# Altium PCB CH340G.PcbDoc
Units mm, origin at the board's own origin, x right, y up, seen from the top; angles counter-clockwise.
Board outline 31.42 x 13.85 mm, 4 copper layers (Top Layer, VCC, GND, Bottom Layer), stack 0.778 mm thick; 19 components, 13 nets, 66 pads, 96 vias.
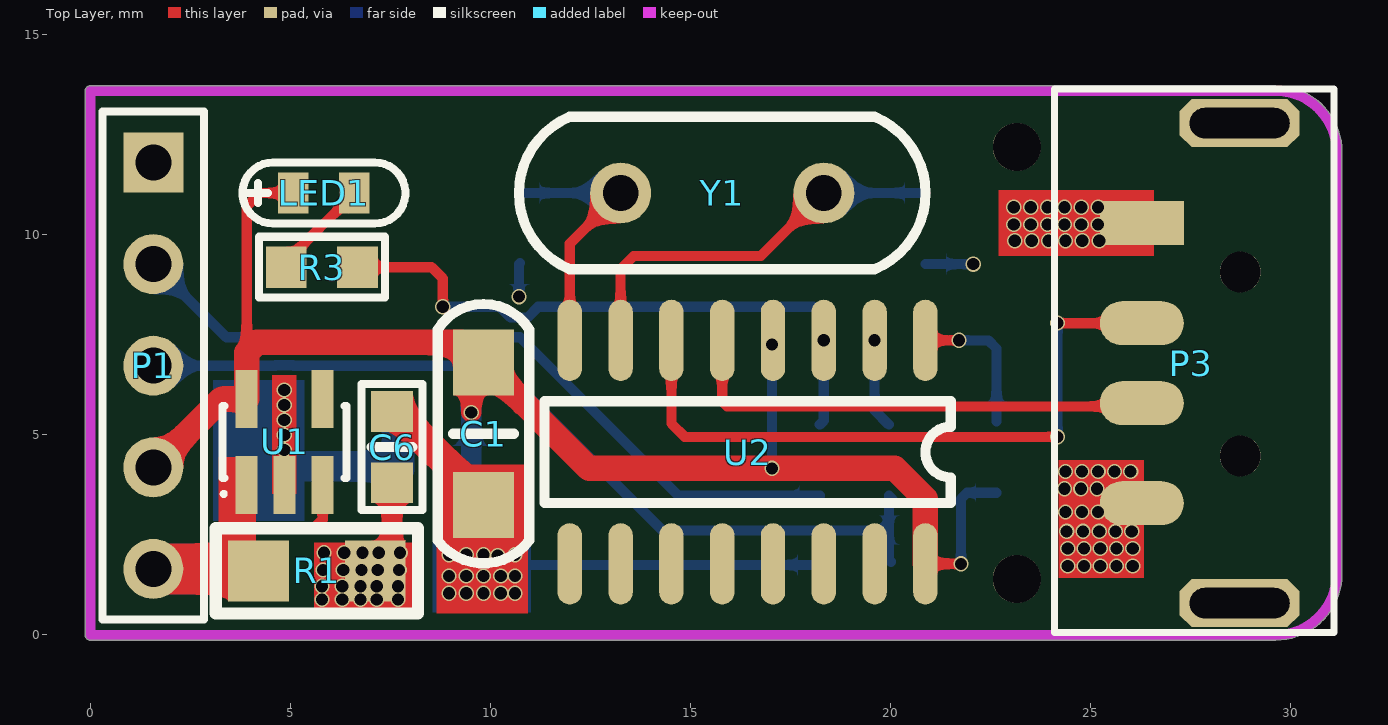
[diagram p0: Top Layer view]
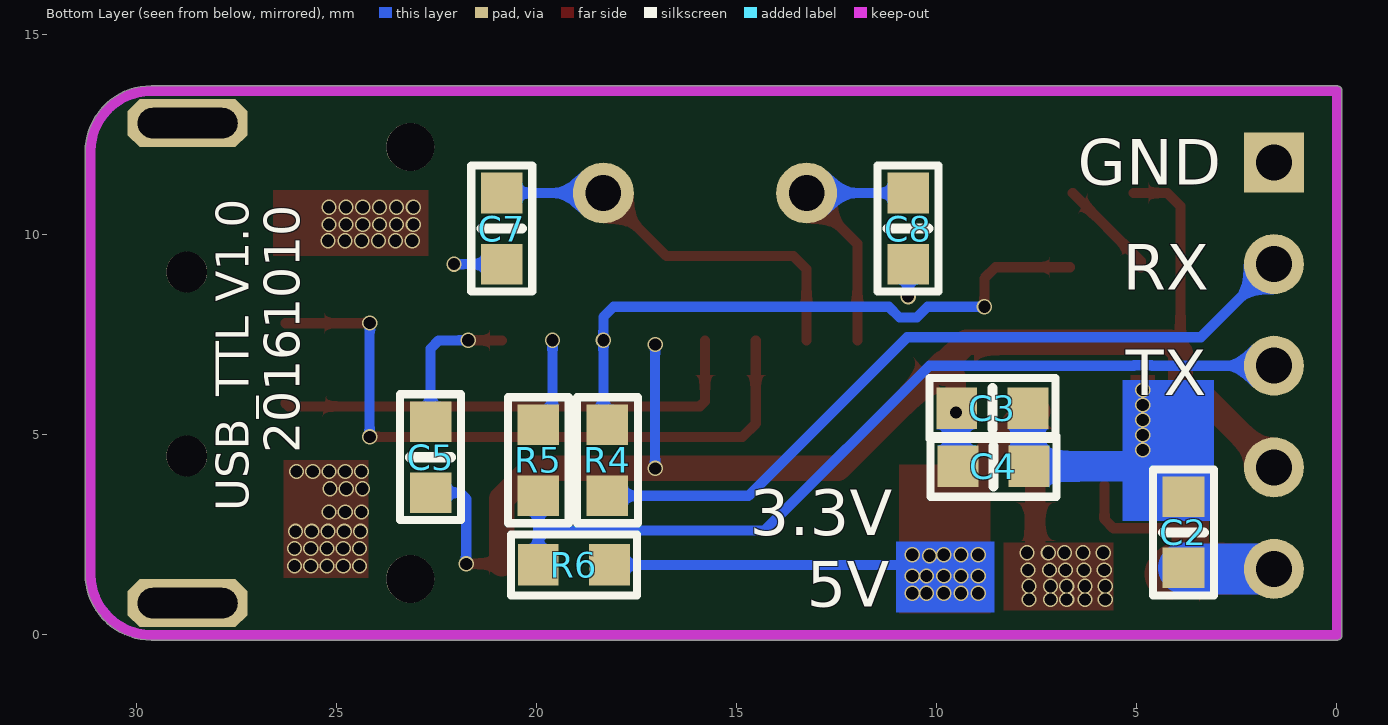
[diagram p1: Bottom Layer view, seen from below]
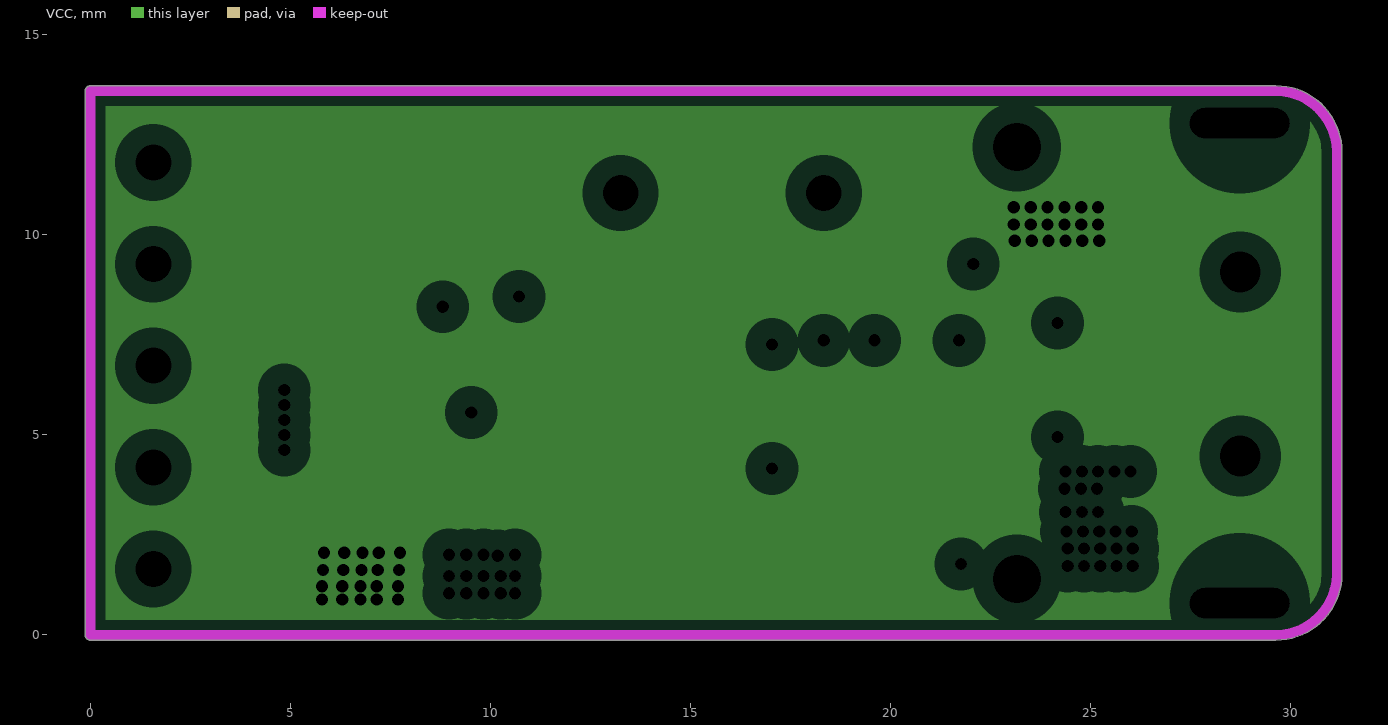
[diagram p2: VCC, clearances drawn from the general rule]
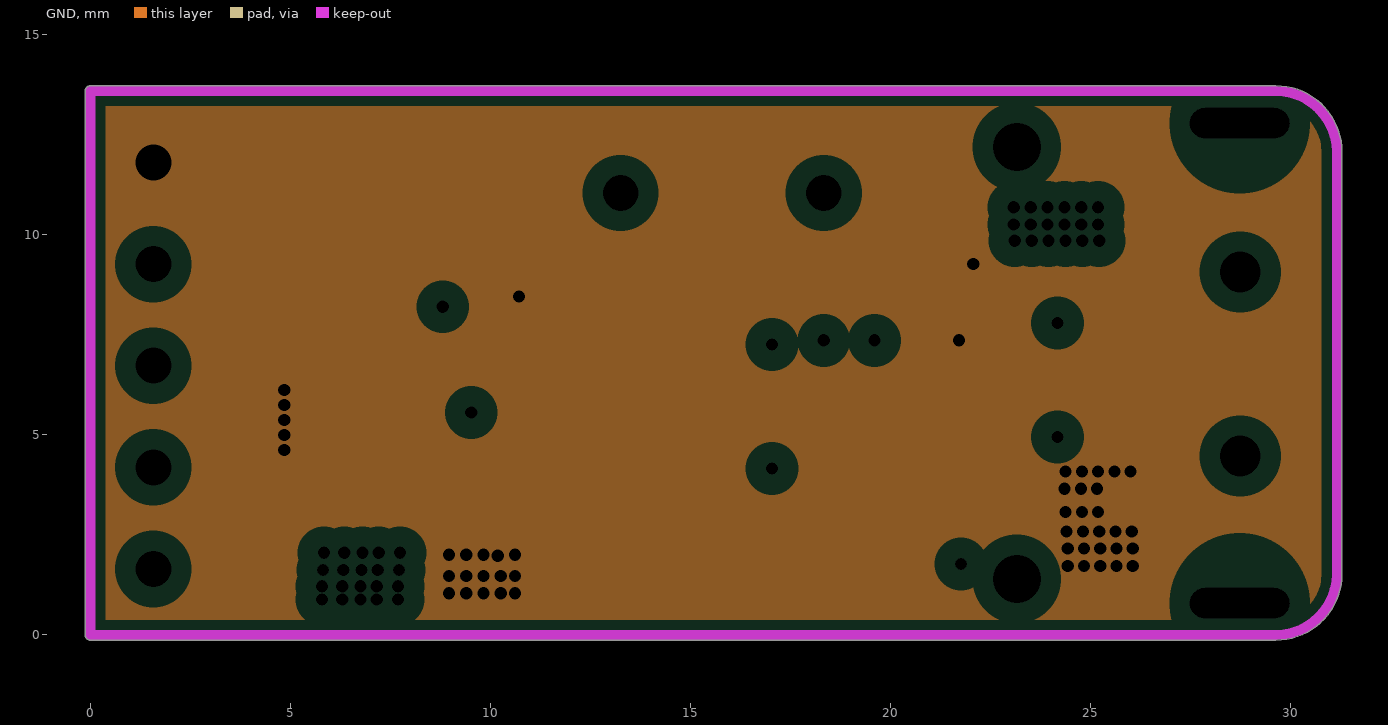
[diagram p3: GND, clearances drawn from the general rule]

## Layer stack, top to bottom
Top Solder: solder mask 0.0102, Solder Resist, Dk 3.5
Top Layer: signal copper 0.0356
Dielectric 1: core 0.254, FR-4, Dk 4.2
VCC: plane copper 0.036, net VCC_+5V
Dielectric 3: prepreg 0.127, Dk 4.2
GND: plane copper 0.036, net GND
Dielectric 2: core 0.254, Dk 4.2
Bottom Layer: signal copper 0.0356
Bottom Solder: solder mask 0.0102, Solder Resist, Dk 3.5

## Board outline
-0.127,0 ccw(c0,0) 0,-0.127 29.641,-0.127 ccw(c29.641,1.524) 31.292,1.524 ccw(c31.165,1.524) 31.292,1.537 ccw(c31.165,1.549) 31.292,1.549 31.292,12.06 ccw(c31.166,12.076) 31.293,12.076 ccw(c29.642,12.076) 29.642,13.727 0,13.727 ccw(c0,13.6) -0.127,13.6

## Design rules (kind name [scope] priority, off if disabled: settings)
Clearance Clearance_1 [All] p1 off: gap=0.381
Clearance [All] p2: gap=0.203
ComponentClearance [All] p1: gap=0 collisioncheckmode=3 verticalgap=0 showdistances=FALSE
HoleSize [All] p1: absolutevalues=TRUE maxlimit=12.7 minlimit=0.025 maxpercent=80.000 minpercent=20.000
HoleToHoleClearance [All] p1: gap=0 allowstackedmicrovias=TRUE
MinimumSolderMaskSliver [All] p1: minsoldermaskwidth=0
PlaneClearance [All] p1: clearance=0.508
PlaneConnect [All] p1: planeconnectstyle=Direct reliefexpansion=0.508 reliefentries=4 reliefconductorwidth=0.254 reliefairgap=0.254
PolygonConnect PolygonConnect_1 [IsVia vs InNet('GND')] p1: connectstyle=Direct reliefconductorwidth=0.254 reliefentries=4 polygonreliefangle="90 Angle" airgapwidth=0.254
PolygonConnect PolygonConnect_2 [All] p2: connectstyle=Direct reliefconductorwidth=0.254 reliefentries=4 polygonreliefangle="90 Angle" airgapwidth=0.254
RoutingVias [All] p1: holewidth=0.711 width=1.27 viastyle="Through Hole" minholewidth=0.711 minwidth=1.27 maxholewidth=0.711 maxwidth=1.27
SilkToSilkClearance [All] p1: silktosilkclearance=0
SilkToSolderMaskClearance [IsPad] p1: minsilkscreentomaskgap=0 clearancetoexposedcopper=TRUE
SolderMaskExpansion [All] p1: expansion=0.102
Width [All] p1: maxlimit=7.62 minlimit=0.203 preferedwidth=0.203
22 further rules are at their usual default settings.

## Classes and differential pairs
component class CH340G: C1 C2 C3 C4 C5 C6 C7 C8 LED1 P1 P3 R1 R4 R5 R6 U1 U2 Y1

## Components (designator, comment, footprint, x,y, rotation, side; value= is the part's Value field where it differs from the comment)
C1 "10uF" 1206-C 9.83,6.807 r270 top
C2 "0.1uF/50V" 0603C 3.835,2.565 r270 bottom
C3 "0.1uF/50V" 0603C 8.611,5.664 r180 bottom
C4 "0.1uF/50V" 0603C 8.585,4.216 r180 bottom
C5 "0.1uF/50V" 0603C 22.657,4.445 r270 bottom
C6 "0.1uF/50V" 0603C 7.544,4.699 r90 top
C7 "22pF/50V" 0603C 20.879,10.16 r90 bottom
C8 "22pF/50V" 0603C 10.719,10.16 r90 bottom
LED1 "LED" LED-0603 5.969,11.049 r0 top
P1 "Header 5" HDR1X5 1.575,11.811 r270 top
P3 "1470695-4" USB1019 27.534,6.795 r0 top locked
R1 "5R" 1206R 5.664,1.6 r180 top locked
R3 "4.7K" 0603R 5.791,9.322 r180 top
R4 "100R" 0603R 18.11,4.369 r90 bottom
R5 "4.7K" 0603R 19.837,4.369 r90 bottom
R6 "4.7K" 0603R 19.075,1.626 r180 bottom
U1 "BL8555-33PRA" SOT23-5 4.877,4.826 r0 top
U2 "Component_1" SO-16 16.434,4.572 r270 top locked
Y1 "12M" XTAL 15.799,11.049 r0 top locked

## Footprints (in the part's own frame and the unit in brackets; to place one, negate y for a bottom-side part, rotate by r counter-clockwise, add the part's x,y. Pads: shape width x height; smd on the part's side, far side on the other; paste and mask are expansions set on the pad)
0603C [mil]
  rect 40x41 smd: 1(-35,0) 2(35,0)
  silkscreen extent -62,-30 62,30, body extent -31,-16 31,16, height 24
0603R [mil]
  rect 40x41 smd: 1(35,5) 2(-35,5)
  silkscreen extent -62,-25 62,35, body extent -31,-11 31,21, height 18
1206-C [mil]
  rect 65x60 smd: 1(0,0) 2(140,0)
  silkscreen extent -58,-45 197,45, body extent 7,-31 133,31, height 39
1206R [mil]
  rect 60x60 smd: 1(-57.5,0) 2(57.5,0)
  silkscreen extent -99,-42 100,42, body extent -63,-31 63,31, height 22
HDR1X5 [mm] "Connector; Header; 5 Position"
  rect 1.5x1.5 hole 0.9: 1(0,0)
  round 1.5 hole 0.9: 2(2.54,0) 3(5.08,0) 4(7.62,0) 5(10.16,0)
  silkscreen extent -1.27,-1.27 11.43,1.27
LED-0603 [mil]
  rect 30x40 smd: 1(-35,0) 2(25,0)
  silkscreen extent -85,-30 75,30, body extent -37,-16 27,16, height 24
SO-16 [mil]
  oval 80x24 smd: 1(-110,175) 2(-110,125) 3(-110,75) 4(-110,25) 5(-110,-25) 6(-110,-75) 7(-110,-125) 8(-110,-175) 9(110,-175) 10(110,-125) 11(110,-75) 12(110,-25) 13(110,25) 14(110,75) 15(110,125) 16(110,175)
  silkscreen extent -50,-200 50,200, body extent -118,-201 118,201, height 67
SOT23-5 [mm]
  rect 0.55x1.45 smd: 1(-0.966,-1.076) 2(-0.016,-1.076) 3(0.934,-1.076) 4(0.934,1.074) 5(-0.966,1.074)
  silkscreen extent -1.59,-1.35 1.53,0.9, body extent -1.5,-1.25 1.5,1.25, height 1.05
USB1019 [mm]
  round 1.016 hole 1.016: 0(1.219,-2.32) 0(1.219,2.28)
  oct 3x1.2 hole 0.762 slot 2.5 at 0 deg: 0A(1.2,6) 0B(1.2,-6)
  rect 2.1x1.1 smd: 1(-1.245,3.5)
  oval 2.1x1.1 smd: 2(-1.245,1) 3(-1.245,-1) 4(-1.245,-3.5)
  silkscreen extent -3.43,-6.73 3.56,6.86, body extent -1.37,-6.3 18.93,6.3, height 3.1
XTAL [mil]
  round 60 hole 35: 1(100,0) 2(-100,0)
  silkscreen extent -200,-75 200,75, body extent -213,-89 213,89, height 138

## Part data
C1: library part "Cap Pol", "Polarized Capacitor (Radial)"
C2: library part Cap, "Capacitor"
C3 C4 C5 C6: library part CAP
C7 C8: library part 0603C
LED1: library part LED3, "BLUE LED"
P1: "Header, 5-Pin"
P3: "USB 1.1, Right Angle, SMT, A Type, Plug, 4 Position, Black"
R1 R3 R4 R5 R6: library part 0603R
U1: library part SGM2019
Y1: library part XTAL, "Crystal Oscillator"

## Free pads (board coordinates)
  round 1.2 hole 1.2: 0(23.165,12.2) 1(23.165,1.4)

## Via types
v1: diameter 0.381, hole 0.305, Top Layer to Bottom Layer, 96 vias

## Nets (pads, with @x,y where several pads share a name; then routed paths per layer and width w, separated by ;. In a path a pad name is that pad's centre, name@x,y a point inside that pad or via, vN(x,y) a via of type N, cw(c..) or ccw(c..) an arc to the next point about the centre after c; other vN are vias at no path point)
5V: C2.2 P1.5 R1.2 U1.1 U1.3 | length 7.9
  Top Layer w0.254: 3.759,2.667 5.588,2.667 5.811,2.89 U1.3
  Top Layer w1.27: P1.5 4.051,1.651 R1.2@4.178,1.524
  Bottom Layer w1.27: P1.5 3.81,1.651 C2.2
GND: C1.2 C2.1 C3.2 C4.2 C5.1 C6.2 C7.1 C8.1 P1.1 P3.4 R6.1 U1.2 U2.1 | length 21.9
  Top Layer w0.254: U2.1 v1(21.717,7.366)
  Top Layer w0.762: C6.2 7.621,5.588 9.83,3.379 C1.2
  Bottom Layer w0.254: 10.185,1.753 R6.1 ; v1(10.719,8.458) C8.1 C8.1@10.744,9.296 ; C7.1 v1(22.073,9.271) ; v1(21.717,7.366) 22.454,7.366 22.657,7.163 C5.1
  Bottom Layer w0.762: 4.445,4.216 C4.2 ; C4.2@7.696,4.115 7.722,4.14 C3.2
  other v1: 8.966,1.041 9.398,1.041 9.83,1.041 10.262,1.041 10.617,1.041 8.966,1.473 9.398,1.473 9.83,1.473 10.262,1.473 10.617,1.473 24.435,1.727 24.841,1.727 25.248,1.727 25.654,1.727 26.06,1.727 10.185,1.981 8.966,2.007 9.398,2.007 9.83,2.007 10.617,2.007 24.435,2.159 24.841,2.159 25.248,2.159 25.654,2.159 26.06,2.159 24.409,2.591 24.816,2.591 25.222,2.591 25.629,2.591 26.035,2.591 24.384,3.073 24.79,3.073 25.197,3.073 24.359,3.658 24.765,3.658 25.171,3.658 24.384,4.089 24.79,4.089 25.197,4.089 25.603,4.089 26.01,4.089 4.851,4.623 4.851,4.997 4.851,5.372 4.851,5.747 4.851,6.121
NetC7_2: C7.2 U2.7 Y1.1 | length 10.2
  Top Layer w0.254: U2.7 13.259,9.144 13.589,9.474 16.764,9.474 Y1.1
  Bottom Layer w0.254: Y1.1 C7.2
NetC8_2: C8.2 U2.8 Y1.2 | length 6.7
  Top Layer w0.254: U2.8 11.989,9.779 Y1.2
  Bottom Layer w0.254: C8.2 Y1.2
NetLED1_2: LED1.2 R3.1 | length 2.6
  Top Layer w0.254: R3.1 4.902,9.347 LED1.2
NetP3_2: P3.2 U2.6 | length 16.8
  Top Layer w0.254: U2.6 14.529,5.283 14.859,4.953 v1(24.181,4.953) ; v1@24.181,7.795 P3.2
  Bottom Layer w0.254: v1(24.181,4.953) v1(24.181,7.798)
NetP3_3: P3.3 U2.5 | length 12.1
  Top Layer w0.254: U2.5 15.799,5.842 15.926,5.715 26.209,5.715 P3.3
RX: P1.2 R4.2 | length 19.1
  Bottom Layer w0.254: P1.2 3.404,7.442 10.744,7.442 14.707,3.48 R4.2
RXD: R3.2 R4.1 U2.3 | length 15.5
  Top Layer w0.254: R3.2 8.534,9.195 8.814,8.915 v1(8.814,8.204)
  Bottom Layer w0.254: v1(8.814,8.204) 10.236,8.204 10.503,7.938 10.934,7.938 11.201,8.204 18.085,8.204 18.339,7.95 v1(18.339,7.366) 18.339,5.359 R4.1
TX: P1.3 R5.2 R6.2 | length 21.9
  Bottom Layer w0.254: P1.3 4.623,6.731 4.636,6.744 5.067,6.744 5.08,6.731 10.185,6.731 14.3,2.616 19.964,2.616 ; R6.2@20.015,1.829 19.964,1.88 19.964,2.616 ; R5.2@20.066,3.378 R5.2 19.964,2.616
TXD: R5.1 U2.2 | length 2.3
  Bottom Layer w0.254: v1(19.609,7.366) 19.609,5.613 R5.1
VCC_+3.3V: C1.1 C3.1 C4.1 C5.2 LED1.1 P1.4 U1.5 U2.4 U2.16 | length 39
  Top Layer w0.254: 3.911,7.061 3.911,10.718 4.242,11.049 LED1.1 ; U2.16 v1(21.768,1.778)
  Top Layer w0.508: v1(9.525,5.563) 9.525,6.452 9.69,6.617 C1.1@9.83,6.477
  Top Layer w0.635: P1.4 3.284,5.9 U1.5 3.911,7.061 4.165,7.315 9.271,7.315 C1.1@9.83,6.756 ; C1.1 12.471,4.166 v1(17.043,4.166) 20.117,4.166 20.879,3.404 U2.16
  Bottom Layer w0.254: v1(17.043,4.166) v1(17.043,7.264) ; v1(21.768,1.778) 21.768,3.404 21.92,3.556 C5.2
  Bottom Layer w0.508: C4.1@9.474,4.115 9.525,4.166 v1(9.525,5.563) 9.525,5.639 C3.1
VCC_+5V: C6.1 P3.1 R1.1 | length 2.4
  Top Layer w0.508: R1.1 7.544,2.019 C6.1
  other v1: 5.791,0.889 6.299,0.889 6.756,0.889 7.163,0.889 7.696,0.889 5.791,1.219 6.299,1.219 6.756,1.219 7.163,1.219 7.696,1.219 5.817,1.626 6.325,1.626 6.782,1.626 7.188,1.626 7.722,1.626 5.842,2.057 6.35,2.057 6.807,2.057 7.214,2.057 7.747,2.057 23.114,9.855 23.536,9.855 23.957,9.855 24.379,9.855 24.801,9.855 25.222,9.855 23.089,10.262 23.51,10.262 23.932,10.262 24.354,10.262 24.775,10.262 25.197,10.262 23.089,10.693 23.51,10.693 23.932,10.693 24.354,10.693 24.775,10.693 25.197,10.693
pads on no net: P3.0 P3.0A P3.0B U1.4 U2.9 U2.10 U2.11 U2.12 U2.13 U2.14 U2.15

## Polygon pours and split planes (outlines as drawn)
VCC_+5V on VCC (split plane): 30.784,12.087 30.783,12.076 30.784,12.09
VCC_+5V on VCC (split plane): 29.791,13.21 29.938,13.18 30.079,13.132 30.213,13.066 30.338,12.983 30.45,12.884 30.549,12.772 30.632,12.648 30.698,12.514 30.746,12.372 30.775,12.225 30.782,12.124 30.772,12.126 30.751,12.076 30.783,12.076 30.783,12.073 30.782,12.06 30.782,1.588 30.767,1.589 30.75,1.549 30.782,1.549 30.782,1.546 30.781,1.537 30.782,1.527 30.782,1.524 30.783,1.513 30.783,1.51 30.782,1.524 30.75,1.524 30.767,1.484 30.782,1.486 30.774,1.375 30.745,1.228 30.697,1.086 30.631,0.952 30.548,0.828 30.449,0.716 30.337,0.617 30.212,0.534 30.078,0.468 29.937,0.42 29.79,0.39 29.655,0.382 29.641,0.383 0.383,0.383 0.383,13.217 29.642,13.217 29.656,13.218
GND on GND (split plane): 30.784,12.087 30.783,12.076 30.784,12.09
GND on GND (split plane): 29.791,13.21 29.938,13.18 30.079,13.132 30.213,13.066 30.338,12.983 30.45,12.884 30.549,12.772 30.632,12.648 30.698,12.514 30.746,12.372 30.775,12.225 30.782,12.124 30.772,12.126 30.751,12.076 30.783,12.076 30.783,12.073 30.782,12.06 30.782,1.588 30.767,1.589 30.75,1.549 30.782,1.549 30.782,1.546 30.781,1.537 30.782,1.527 30.782,1.524 30.783,1.513 30.783,1.51 30.782,1.524 30.75,1.524 30.767,1.484 30.782,1.486 30.774,1.375 30.745,1.228 30.697,1.086 30.631,0.952 30.548,0.828 30.449,0.716 30.337,0.617 30.212,0.534 30.078,0.468 29.937,0.42 29.79,0.39 29.655,0.382 29.641,0.383 0.383,0.383 0.383,13.217 29.642,13.217 29.656,13.218

## Keep-outs
Keep-Out Layer:
  lines w0.254: 31.165,1.524 cw(c29.641,1.524) 29.641,0 0,0 0,13.6 29.642,13.6 cw(c29.642,12.076) 31.166,12.076 ; 31.165,1.549 31.165,12.076

## Other copper
Top Layer:
  rectangle net VCC_+5V: 22.708,9.474 26.594,11.125
  rectangle net GND: 24.206,1.422 26.34,4.369
  rectangle net GND: 8.661,0.533 10.947,4.267
  rectangle net GND: 4.547,3.531 5.156,6.502
  rectangle net 5V: 3.2,1.88 4.14,4.445
  rectangle net VCC_+5V: 5.588,0.61 8.331,2.311
Bottom Layer:
  rectangle net GND: 3.073,2.845 5.359,6.375
  rectangle net GND: 8.56,0.559 11.024,2.337

## Silkscreen, mask and mechanical layers (free items; w line width, h text height)
Bottom Overlay:
  text "GND" at 6.477,11.252 h1.14
  text "RX" at 5.359,8.636 h1.14
  text "TX" at 5.283,5.994 h1.14
  text "20161010" at 25.629,4.547 h1.52 r270
  text "USB_TTL V1.0" at 26.924,3.099 h1.4 r270
  text "3.3V" at 14.681,2.489 h1.14
  text "5V" at 13.259,0.711 h1.14